# Altium PCB Concentrator1.PcbDoc
Units mm, origin at the board's own origin, x right, y up, seen from the top; angles counter-clockwise.
Board outline 100 x 90 mm, 2 copper layers (Top Layer, Bottom Layer); 86 components, 77 nets, 318 pads, 29 vias.
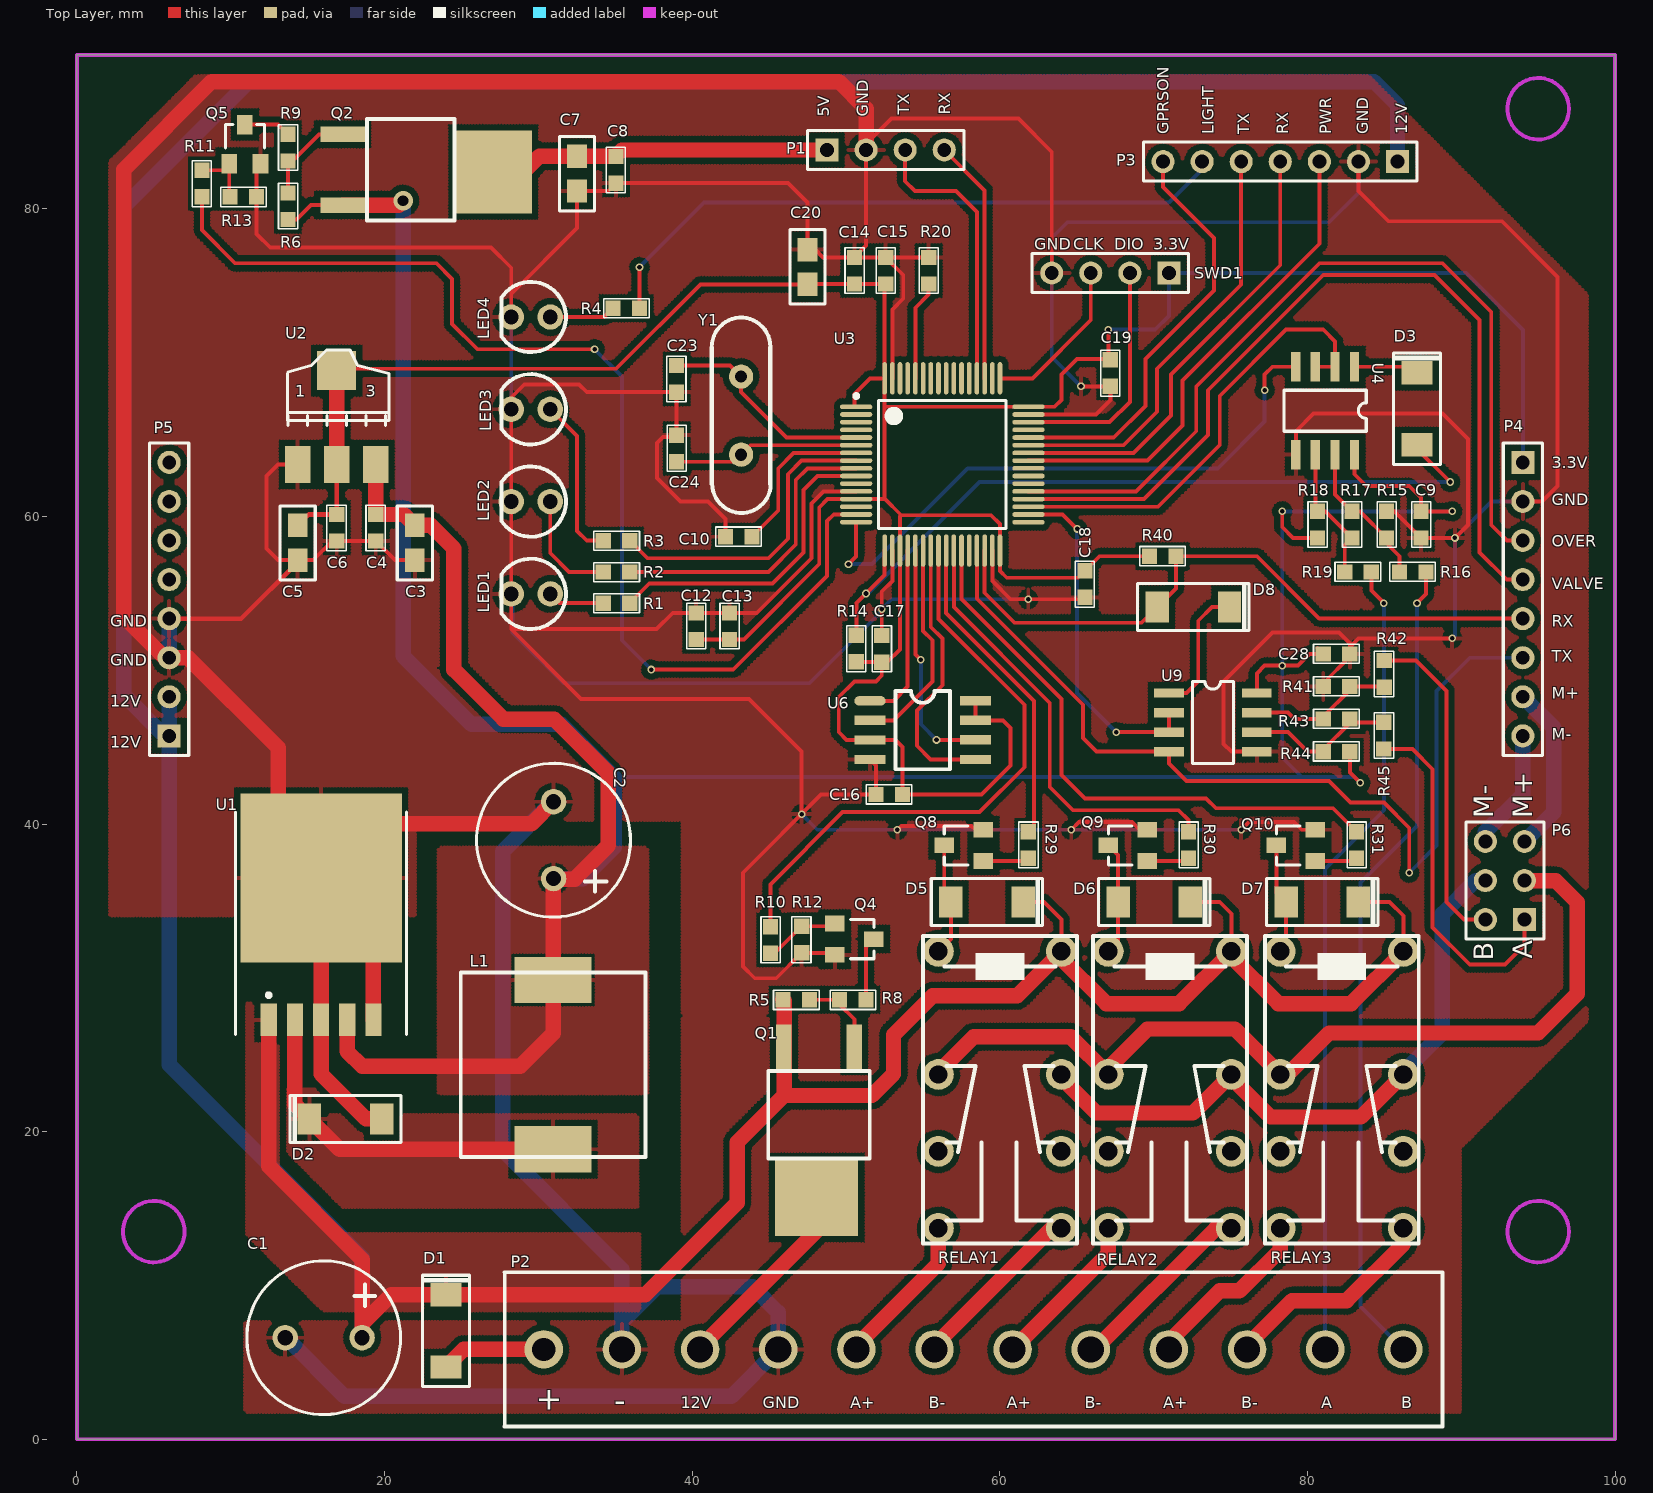
[diagram p0: Top Layer view]
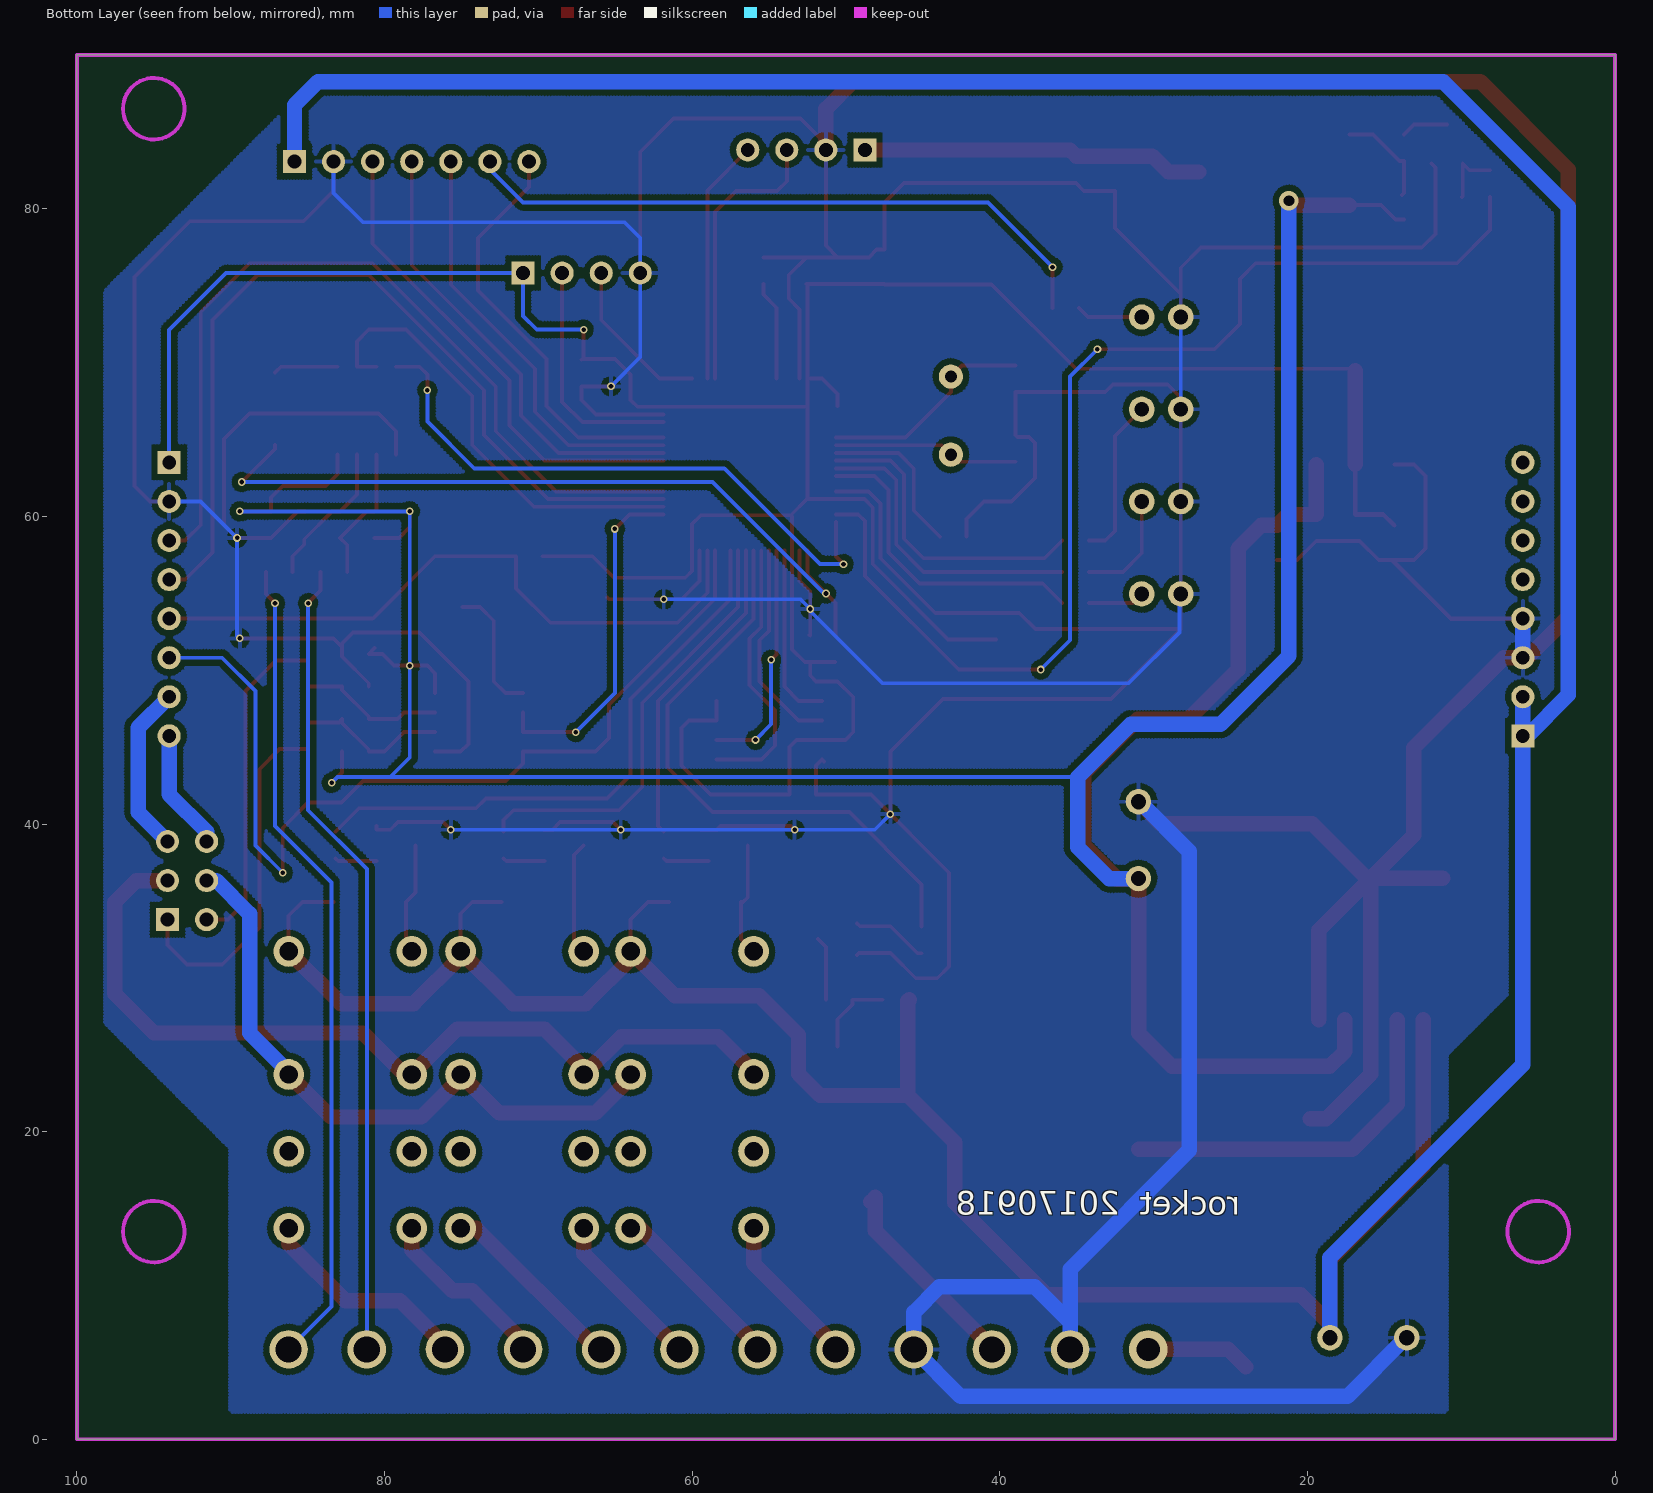
[diagram p1: Bottom Layer view, seen from below]

## Layer stack, top to bottom
Top Layer: signal copper 0.0356
Dielectric: dielectric 0.32, FR-4, Dk 4.8
Bottom Layer: signal copper 0.0356

## Board outline
0,0 0,90 100,90 100,0

## Design rules (kind name [scope] priority, off if disabled: settings)
Clearance [All] p1: gap=0.2
ComponentClearance [All] p1: gap=0.254 collisioncheckmode=3 verticalgap=0.254
PolygonConnect [All] p1: connectstyle=Relief reliefconductorwidth=0.254 reliefentries=4 polygonreliefangle="90 Angle"
RoutingVias [All] p1: holewidth=0.3 width=0.5 viastyle="Through Hole" minholewidth=0.3 minwidth=0.5 maxholewidth=0.711 maxwidth=1.27
SolderMaskExpansion [All] p1: expansion=0.102
TestPointUsage [All] p1: valid=0 allowmultiple=FALSE
Testpoint [All] p1: side=15 testpointundercomponent=TRUE minsize=1.016 maxsize=2.54 preferedsize=1.524 minholesize=0 maxholesize=1.016 preferedholesize=0.813 testpointgrid=0.025 style=1023 order=0123456789
Width [All] p1: maxlimit=1 minlimit=0.254 preferedwidth=0.254
18 further rules are at their usual default settings.

## Components (designator, comment, footprint, x,y, rotation, side; value= is the part's Value field where it differs from the comment)
C1 "Cap Pol1" "C_DJ - duplicate" 18.542,6.604 r0 top
C2 "Cap Pol1" "C_DJ - duplicate" 30.988,36.449 r270 top
C3 "Cap" 0805 21.971,57.15 r90 top
C4 "Cap" 0603 19.431,58.395 r270 top
C5 "Cap" 0805 14.351,57.15 r90 top
C6 "Cap" 0603 16.891,58.395 r270 top
C7 "Cap" 0805 32.512,81.153 r90 top
C8 "Cap" 0603 35.052,81.661 r270 top
C9 "Cap" 0603 87.376,60.325 r90 top
C10 "Cap" 0603 42.164,58.674 r180 top
C12 "Cap" 0603 40.259,53.721 r90 top
C13 "Cap" 0603 42.418,53.721 r90 top
C14 "Cap" 0603 50.546,76.835 r90 top
C15 "Cap" 0603 52.578,76.835 r90 top
C16 "Cap" 0603 51.943,41.91 r180 top
C17 "Cap" 0603 52.324,52.248 r90 top
C18 "Cap" 0603 65.532,54.737 r270 top
C19 "Cap" 0603 67.183,68.453 r270 top
C20 "Cap" 0805 47.498,77.343 r270 top
C23 "Cap" 0603 38.989,68.072 r270 top
C24 "Cap" 0603 38.989,65.278 r90 top
C28 "Cap" 0603 81.026,51.054 r180 top
D1 "Diode 1N4007" M7-4007 24.003,4.699 r90 top
D2 "SS34" M7-4007 19.812,20.828 r180 top
D3 "M7" M7-4007 87.122,64.643 r90 top
D5 "M7" M7-4007 56.816,34.925 r0 top
D6 "M7" M7-4007 67.691,34.925 r0 top
D7 "M7" M7-4007 78.613,34.925 r0 top
D8 "M7" M7-4007 70.231,54.102 r0 top
L1 "Inductor" L12*12 36.957,30.353 r180 top
LED1 "LED" LED 30.775,54.96 r180 top
LED2 "LED" LED 30.775,60.96 r180 top
LED3 "LED" LED 30.775,66.96 r180 top
LED4 "LED" LED 30.775,72.96 r180 top
P1 "Header 4" HDR1X4 48.768,83.82 r0 top
P2 "Header 12" P12 30.353,5.842 r0 top
P3 "Header 7" HDR1X7 85.852,83.058 r180 top
P4 "Header 8" HDR1X8 94,63.509 r270 top locked
P5 "Header 8" HDR1X8 6,45.729 r90 top locked
P6 "Header 3X2" HDR2X3 94.107,33.782 r90 top locked
Q1 "PMOS-2" 78M05/20 50.546,25.527 r180 top
Q2 "PMOS-2" 78M05/20 17.272,84.836 r270 top
Q4 "2N3904" NPN-PNP 49.276,33.528 r270 top
Q5 "2N3904" NPN-PNP 9.906,82.931 r0 top
Q8 "2N3904" NPN-PNP 58.928,37.592 r90 top
Q9 "2N3904" NPN-PNP 69.596,37.592 r90 top
Q10 "2N3904" NPN-PNP 80.518,37.592 r90 top
R1 "Res2" 0603 35.941,54.356 r0 top
R2 "Res2" 0603 35.941,56.388 r0 top
R3 "Res2" 0603 35.941,58.42 r0 top
R4 "Res2" 0603 36.576,73.533 r0 top
R5 "Res2" 0603 47.625,28.575 r0 top
R6 "Res2" 0603 13.716,81.026 r90 top
R8 "Res2" 0603 51.308,28.575 r0 top
R9 "Res2" 0603 13.716,84.836 r90 top
R10 "Res2" 0603 45.085,33.325 r90 top
R11 "Res2" 0603 8.128,80.772 r270 top
R12 "Res2" 0603 47.117,31.623 r270 top
R13 "Res2" 0603 11.684,80.772 r0 top
R14 "Res2" 0603 50.673,50.546 r270 top
R15 "Res2" 0603 85.132,60.325 r90 top
R16 "Res2" 0603 85.979,56.388 r180 top
R17 "Res2" 0603 82.889,60.325 r90 top
R18 "Res2" 0603 80.645,60.325 r90 top
R19 "Res2" 0603 82.423,56.388 r180 top
R20 "Res2" 0603 55.372,76.835 r90 top
R29 "Res2" 0603 61.849,39.497 r90 top
R30 "Res2" 0603 72.263,39.497 r90 top
R31 "Res2" 0603 83.185,39.497 r90 top
R40 "Res2" 0603 69.723,57.404 r180 top
R41 "Res2" 0603 81.026,48.937 r180 top
R42 "Res2" 0603 84.988,48.895 r270 top
R43 "Res2" 0603 81.026,46.821 r180 top
R44 "Res2" 0603 81.026,44.704 r180 top
R45 "Res2" 0603 84.963,46.609 r90 top
RELAY1 "Relay-DPDT" Relay-DPDP 64.008,13.716 r180 top
RELAY2 "Relay-DPDT" Relay-DPDP 75.057,13.716 r180 top
RELAY3 "Relay-DPDT" Relay-DPDP 86.233,13.716 r180 top
SWD1 "SWD" HDR1X4 70.993,75.819 r180 top
U1 "LM2596S-5.0" TO-263-5 15.875,31.496 r0 top
U2 "AMS1117-3.3" AMS-1117 14.351,63.373 r0 top
U3 "STM32F103RBT6" LQFP64_M 56.261,63.373 r0 top
U4 "SP485" SOP8 83.058,69.723 r180 top
U6 "W25X16" W24X16 51.562,48.006 r0 top
U9 "SP485" SOP8 70.993,48.514 r270 top
Y1 "8M" OSC 43.18,64.008 r270 top

## Footprints (in the part's own frame and the unit in brackets; to place one, negate y for a bottom-side part, rotate by r counter-clockwise, add the part's x,y. Pads: shape width x height; smd on the part's side, far side on the other; paste and mask are expansions set on the pad)
78M05/20 [mm]
  rect 1x2.9 smd: 1(0,0) 3(4.6,0)
  rect 5.4x5 smd: 2(2.45,9.8)
  silkscreen extent -1,1.57 5.6,7.27
0603 [mil]
  rect 39x39 smd: 1(0,0) 2(-68,0)
  silkscreen extent -92,-25 25,24
0805 [mil]
  rect 60x50 smd: 1(0,0) 2(89.02,0)
  silkscreen extent -51,-45 139,45
AMS-1117 [mil]
  rect 65x94.49 smd: 1(0,0) 2(100,0) 3(200,0)
  rect 100x100 smd: 4(100,240)
  silkscreen extent -26,100 234,293
"C_DJ - duplicate" [mil]
  round 65 hole 39: 1(0,0) 2(-196.85,0)
  silkscreen extent -295,-197 98,197
HDR1X4 [mm] "Connector; Header; 4 Position"
  rect 1.5x1.5 hole 0.9: 1(0,0)
  round 1.5 hole 0.9: 2(2.54,0) 3(5.08,0) 4(7.62,0)
  silkscreen extent -1.27,-1.27 8.89,1.27
HDR1X7 [mm] "Connector; Header; 7 Position"
  rect 1.5x1.5 hole 0.9: 1(0,0)
  round 1.5 hole 0.9: 2(2.54,0) 3(5.08,0) 4(7.62,0) 5(10.16,0) 6(12.7,0) 7(15.24,0)
  silkscreen extent -1.27,-1.27 16.51,1.27
HDR1X8 [mm] "Connector; Header; 8 Position"
  rect 1.5x1.5 hole 0.9: 1(0,0)
  round 1.5 hole 0.9: 2(2.54,0) 3(5.08,0) 4(7.62,0) 5(10.16,0) 6(12.7,0) 7(15.24,0) 8(17.78,0)
  silkscreen extent -1.27,-1.27 19.05,1.27
HDR2X3 [mm] "Connector; Header; 3x2 Position"
  rect 1.5x1.5 hole 0.9: 1(0,0)
  round 1.5 hole 0.9: 2(0,2.54) 3(2.54,0) 4(2.54,2.54) 5(5.08,0) 6(5.08,2.54)
  silkscreen extent -1.27,-1.27 6.35,3.81
L12*12 [mm]
  rect 5x3 smd: 1(6,11.5) 2(6,0.5)
  silkscreen extent 0,0 12,12
LED [mil]
  round 65 hole 38: A(0,0) K(100,0)
  silkscreen extent -40,-90 125,90
LQFP64_M [mm] "Thin QFP, 64-Leads, Body 10x10mm, Pitch 0.5mm, IPC Low Density"
  oval 2.1x0.3 smd: 1(-5.6,3.75) 2(-5.6,3.25) 3(-5.6,2.75) 4(-5.6,2.25) 5(-5.6,1.75) 6(-5.6,1.25) 7(-5.6,0.75) 8(-5.6,0.25) 9(-5.6,-0.25) 10(-5.6,-0.75) 11(-5.6,-1.25) 12(-5.6,-1.75) 13(-5.6,-2.25) 14(-5.6,-2.75) 15(-5.6,-3.25) 16(-5.6,-3.75) 33(5.6,-3.75) 34(5.6,-3.25) 35(5.6,-2.75) 36(5.6,-2.25) 37(5.6,-1.75) 38(5.6,-1.25) 39(5.6,-0.75) 40(5.6,-0.25) 41(5.6,0.25) 42(5.6,0.75) 43(5.6,1.25) 44(5.6,1.75) 45(5.6,2.25) 46(5.6,2.75) 47(5.6,3.25) 48(5.6,3.75)
  oval 0.3x2.1 smd: 17(-3.75,-5.6) 18(-3.25,-5.6) 19(-2.75,-5.6) 20(-2.25,-5.6) 21(-1.75,-5.6) 22(-1.25,-5.6) 23(-0.75,-5.6) 24(-0.25,-5.6) 25(0.25,-5.6) 26(0.75,-5.6) 27(1.25,-5.6) 28(1.75,-5.6) 29(2.25,-5.6) 30(2.75,-5.6) 31(3.25,-5.6) 32(3.75,-5.6) 49(3.75,5.6) 50(3.25,5.6) 51(2.75,5.6) 52(2.25,5.6) 53(1.75,5.6) 54(1.25,5.6) 55(0.75,5.6) 56(0.25,5.6) 57(-0.25,5.6) 58(-0.75,5.6) 59(-1.25,5.6) 60(-1.75,5.6) 61(-2.25,5.6) 62(-2.75,5.6) 63(-3.25,5.6) 64(-3.75,5.6)
  silkscreen extent -5.72,-4.15 4.15,4.57, body extent -5,-5 5,5, height 1.6
M7-4007 [mil]
  rect 60x80 smd: 1(0,0) 2(185,0)
  silkscreen extent -50,-60 235,60
NPN-PNP [mil]
  rect 40x50 smd: B(0,0) C(40,100) E(80,0)
  silkscreen extent -10,40 90,100
OSC [mil]
  round 62 hole 31: 1(0,0) 2(-200,0)
  silkscreen extent -351,-75 149,76
P12 [mm]
  round 2.5 hole 1.5: 1(0,0)
  round 2.5 hole 1.7: 2(5.08,0) 3(10.16,0) 4(15.24,0) 5(20.32,0) 6(25.4,0) 7(30.48,0) 8(35.56,0) 9(40.64,0) 10(45.72,0) 11(50.8,0) 12(55.88,0)
  silkscreen extent -2.56,-5 58.42,5.02
Relay-DPDP [mm]
  round 2 hole 1.2: 1(0,-10) 2(0,-5) 3(0,0) 4(8,-10) 5(8,-5) 6(8,0) 7(0,-18) 8(8,-18)
  silkscreen extent -1,-19 9,1
SOP8 [mil]
  rect 24x76 smd: 1(0,0) 2(50,0) 3(100,0) 4(150,0) 5(150,225) 6(100,225) 7(50,225) 8(0,225)
  silkscreen extent -30,60 180,165
TO-263-5 [mm]
  rect 1.05x2.1 smd: 1(-3.4,-4.225) 2(-1.7,-4.225) 3(0,-4.225) 4(1.7,-4.225) 5(3.4,-4.225)
  rect 10.5x11 smd: 6(0,4.987)
  silkscreen extent -5.55,-5.18 5.55,9.28, body extent -5.33,-4.7 5.33,10.29, height 3
W24X16 [mil]
  oval 80x24 smd: 1(0,0)
  rect 80x24 smd: 2(0,-50.06) 3(0,-100.06) 4(0,-150.06) 5(270,-150) 6(270,-100) 7(270,-50) 8(270,0)
  silkscreen extent 65,-175 205,25

## Part data
C1 C2: "Polarized Capacitor (Radial)"
C3 C4 C5 C6 C7 C8 C9 C10 C12 C13 C14 C15 C16 C17 C18 C19 C20 C23 C24 C28: "Capacitor"
D1: "1 Amp General Purpose Rectifier"
D2 D3 D5 D6 D7 D8: library part "Diode 1N4007", "1 Amp General Purpose Rectifier"
LED1 LED2 LED3 LED4: library part LED0, "Typical INFRARED GaAs LED"
P1: "Header, 4-Pin"
P2 P5 SWD1: library part "Header 4", "Header, 4-Pin"
P3: "Header, 7-Pin"
P4: "Header, 8-Pin"
P6: "Header, 3-Pin, Dual row"
Q1 Q2: "P-Channel Power MOSFET"
Q4 Q5 Q8 Q9 Q10: "NPN General Purpose Amplifier"
R1 R2 R3 R4 R5 R6 R8 R9 R10 R11 R12 R13 R14 R15 R16 R17 R18 R19 R20 R29 R30 R31 R40 R41 R42 R43 R44 R45: "Resistor"
RELAY1 RELAY2 RELAY3: "Dual-Pole Dual-Throw Relay"
U1: "5V稳压芯片"
U3: "STM32 ARM-based 32-bit MCU with 128 Kbytes Flash, 64-pin LQFP, Industrial Temperature"
U4 U9: library part Pro55.tmp_SP485_20
U6: library part W24X16
Y1: library part XTAL, "Crystal Oscillator"

## Via types
v1: diameter 0.5, hole 0.3, Top Layer to Bottom Layer, 28 vias
v2: diameter 1.27, hole 0.711, Top Layer to Bottom Layer, 1 vias

## Nets (pads, with @x,y where several pads share a name; then routed paths per layer and width w, separated by ;. In a path a pad name is that pad's centre, name@x,y a point inside that pad or via, vN(x,y) a via of type N, cw(c..) or ccw(c..) an arc to the next point about the centre after c; other vN are vias at no path point)
12V/485: P2.3 Q1.2 | length 13.4
  Top Layer w1: P2.3 40.513,5.969 48.096,13.552 Q1.2 Q1.2@48.387,15.436
485_CTRL1: U3.34 U9.2 U9.3 | length 22.5
  Top Layer w0.254: U3.34 64.083,60.123 v1(65.024,59.182) ; v1(67.564,45.974) U9.3 U9.2
  Bottom Layer w0.254: v1(65.024,59.182) 65.024,48.514 v1(67.564,45.974)
485_CTRL2: U3.35 U4.2 U4.3 | length 29.8
  Top Layer w0.254: U3.35 70.275,60.623 74.295,64.643 74.295,67.818 78.613,72.136 81.026,72.136 81.788,71.374 U4.2 U4.3
485A1: P6.1 R45.2 | length 23.2
  Top Layer w0.254: R45.2 86.817,44.882 88.138,43.561 88.138,33.274 90.551,30.861 92.837,30.861 94.107,32.131 P6.1
485A2: P2.11 R19.2 | length 52.5
  Top Layer w0.254: R19.2 84.15,55.169 v1(84.963,54.356)
  Bottom Layer w0.254: P2.11 81.153,37.084 84.963,40.894 v1(84.963,54.356)
485B1: P6.2 R42.2 | length 21.6
  Top Layer w0.254: R42.2 87.046,50.622 89.027,48.641 89.027,34.925 90.17,33.782 P6.2
485B2: P2.12 R16.2 | length 53.5
  Top Layer w0.254: v1(87.122,54.356) 87.706,54.94 R16.2
  Bottom Layer w0.254: P2.12 83.439,8.636 83.439,36.195 87.122,39.878 v1(87.122,54.356)
485POW_CTRL: R10.1 U3.24 | length 38.8
  Top Layer w0.254: R10.1 45.085,36.068 49.784,40.767 58.674,40.767 61.595,43.688 61.595,47.752 56.011,53.336 U3.24
A+: P6.3 RELAY1.4 RELAY2.4 RELAY3.4 | length 58.5
  Top Layer w1: RELAY1.4 56.008,23.877 58.293,26.162 64.611,26.162 RELAY2.4 67.057,24.131 69.596,26.67 75.279,26.67 RELAY3.4 78.707,23.716 81.407,26.416 94.996,26.416 97.536,28.956 97.536,34.925 96.139,36.322 P6.3
B-: P6.4 RELAY1.1 RELAY2.1 RELAY3.1 | length 42.1
  Top Layer w1: RELAY1.1 64.008,23.495 66.294,21.209 72.55,21.209 RELAY2.1 75.057,23.495 77.597,20.955 83.472,20.955 RELAY3.1
  Bottom Layer w1: RELAY3.1@86.36,23.622 86.36,24.003 88.773,26.416 88.773,34.163 90.932,36.322 P6.4
BUS+1: P2.5 RELAY1.6 | length 10.1
  Top Layer w1: P2.5 50.673,6.096 56.008,11.431 RELAY1.6
BUS+2: P2.7 RELAY2.6 | length 10.3
  Top Layer w1: P2.7 67.056,12.065 RELAY2.6@67.056,13.589
BUS+3: P2.9 RELAY3.6 | length 11.6
  Top Layer w1: P2.9 70.993,6.35 74.295,9.652 75.565,9.652 78.233,12.32 RELAY3.6
BUS-1: P2.6 RELAY1.3 | length 11.7
  Top Layer w1: P2.6 55.753,6.096 63.373,13.716 RELAY1.3
BUS-2: P2.8 RELAY2.3 | length 12.4
  Top Layer w1: P2.8 66.167,5.842 74.041,13.716 RELAY2.3
BUS-3: P2.10 RELAY3.3 | length 14.2
  Top Layer w1: P2.10 76.073,6.096 78.994,9.017 82.55,9.017 86.233,12.7 RELAY3.3
DELAY_1: R29.1 U3.25 | length 20.8
  Top Layer w0.254: U3.25 56.511,53.725 62.23,48.006 62.23,39.878 R29.1
DELAY_2: R30.1 U3.26 | length 28.6
  Top Layer w0.254: U3.26 57.011,54.114 63.246,47.879 63.246,42.418 64.77,40.894 71.628,40.894 72.263,40.259 R30.1
DELAY_3: R31.1 U3.27 | length 38
  Top Layer w0.254: U3.27 57.511,54.63 64.008,48.133 64.008,43.18 65.532,41.656 73.406,41.656 74.041,41.021 81.661,41.021 R31.1
GND: C1.2 C2.2 C3.1 C4.1 C5.1 C6.1 C7.1 C8.1 C9.2 C10.1 C12.1 C13.1 C14.1 C15.1 C16.1 C17.1 C18.1 C19.1 C20.1 C23.1 C24.1 C28.2 D2.1 LED1.K LED2.K LED3.K LED4.K P1.2 P2.2 P2.4 P3.2 P4.2 P5.3 P5.4 Q4.E Q5.E Q8.E Q9.E Q10.E R12.1 R13.1 R15.1 R20.1 R41.1 SWD1.4 U1.3 U1.5 U1.6 U2.1 U3.12 U3.18 U3.31 U3.47 U3.63 U4.5 U6.4 U9.5 | length 742.1
  Top Layer w0.254: Q5.E 11.684,82.677 11.684,78.359 12.573,77.47 26.924,77.47 28.235,76.159 LED4.K ; U2.1 13.081,63.373 12.319,62.611 12.319,57.912 13.081,57.15 15.367,57.15 16.612,58.395 C4.1 20.676,57.15 C3.1 ; 28.235,74.463 32.512,78.74 C7.1 34.544,81.153 C8.1 46.228,81.661 47.498,80.391 C20.1 48.006,77.343 48.514,76.835 R20.1 ; C10.1 42.164,59.817 41.021,60.96 39.243,60.96 37.719,62.484 37.719,64.77 38.1,65.151 38.862,65.151 C24.1 C23.1 33.147,68.072 32.639,68.58 29.083,68.58 28.235,67.732 28.235,52.664 ; v1(47.117,40.64) 47.117,44.704 43.688,48.133 32.766,48.133 28.235,52.664 ; Q4.E 49.149,31.623 R12.1 45.466,29.972 44.069,29.972 43.307,30.734 43.307,36.83 48.387,41.91 C16.1 51.943,43.813 U6.4 U6.4@51.435,44.067 ; C14.1 51.308,77.597 51.308,84.201 52.959,85.852 61.214,85.852 63.373,83.693 SWD1.4 ; U3.12 48.542,61.623 47.752,60.833 47.752,57.277 44.196,53.721 38.735,53.721 37.678,52.664 28.235,52.664 ; C17.1@52.376,52.3 C17.1 52.324,55.118 53.011,55.805 U3.18 ; C15.1 53.721,75.692 53.721,74.168 53.011,73.458 U3.63 ; v1(53.34,39.624) 53.594,39.878 58.166,39.878 58.42,39.624 Q8.E@59.436,39.624 ; U3.31 59.511,55.805 60.706,54.61 65.405,54.61 C18.1 ; U3.47 66.242,66.623 67.183,67.564 C19.1 v1(65.278,68.453) ; v1(64.643,39.624) 65.151,40.132 68.58,40.132 69.088,39.624 Q9.E ; v1(75.692,39.624) 76.2,40.132 79.121,40.132 79.629,39.624 Q10.E Q10.E@80.518,39.878 ; U9.5 75.057,44.704 74.549,45.212 74.549,49.276 77.724,52.451 82.042,52.451 82.753,51.74 C28.2 82.753,50.876 81.026,49.149 R41.1 ; U4.5 79.248,65.532 80.391,66.675 88.773,66.675 90.424,65.024 90.424,59.436 v1(89.586,58.598) C9.2 85.649,60.325 R15.1 ; C28.2@82.753,51.511 83.312,52.07 v1(89.408,52.07) ; P3.2 83.312,81.153 85.281,79.184 92.647,79.184 96.266,75.565 96.266,61.976 95.259,60.969 P4.2
  Top Layer w0.3: P5.4@6.096,53.34 10.668,53.34 C5.1@14.478,57.15
  Top Layer w1: P5.3 5.706,50.809 3.048,53.467 3.048,82.55 8.763,88.265 49.53,88.265 51.308,86.487 P1.2 ; P5.3@6.096,50.8 7.239,50.8 13.081,44.958 13.081,39.277 19.275,33.083 U1.5 ; U1.6@11.21,36.483 U1.6 15.875,23.749 18.796,20.828 D2.1 ; U1.6@15.875,36.195 19.685,40.005 29.544,40.005 C2.2
  Bottom Layer w0.254: LED1.K 28.321,54.874 28.321,52.451 31.623,49.149 47.625,49.149 52.324,53.848 v1(52.324,53.975) 52.959,54.61 v1(61.849,54.61) ; LED3.K LED4.K ; v1(47.117,40.64) 48.133,39.624 v1(75.692,39.624) ; v1(65.278,68.453) 63.373,70.358 63.373,78.105 64.389,79.121 81.407,79.121 83.312,81.026 P3.2@83.312,83.185 ; v1(89.408,52.07) 89.586,52.248 v1(89.586,58.598) 91.957,60.969 P4.2
  Bottom Layer w1: P5.3 6,53.244 P5.4@6.096,53.34 ; C1.2 13.589,6.604 17.399,2.794 42.545,2.794 P2.4 45.593,8.255 43.942,9.906 37.719,9.906 35.433,7.62 ; C2.2 30.908,41.449 27.686,38.227 27.686,18.796 35.433,11.049 P2.2
GPRS_RX: P3.4 U3.42 | length 29.7
  Top Layer w0.254: U3.42 68.695,64.123 71.12,66.548 71.12,69.215 78.232,76.327 P3.4
GPRS_TX: P3.5 U3.43 | length 27.8
  Top Layer w0.254: U3.43 68.052,64.623 70.231,66.802 70.231,69.596 75.692,75.057 P3.5
GPRSPWR_CTRL: P3.3 U3.41 | length 31.8
  Top Layer w0.254: U3.41 69.592,63.623 71.882,65.913 71.882,68.834 80.772,77.724 P3.3
GPRSPWRKEY: P3.7 U3.44 | length 27.5
  Top Layer w0.254: U3.44 67.409,65.123 69.469,67.183 69.469,70.231 73.914,74.676 73.914,78.105 70.612,81.407 P3.7
LED1: R1.1 U3.10 | length 20.5
  Top Layer w0.254: R1.1 37.211,55.626 45.212,55.626 47.244,57.658 47.244,61.722 48.145,62.623 U3.10
LED2: R2.1 U3.9 | length 20
  Top Layer w0.254: R2.1 44.958,56.388 46.736,58.166 46.736,62.357 47.502,63.123 U3.9
LED3: R3.1 U3.8 | length 20.3
  Top Layer w0.254: R3.1 37.084,57.277 44.958,57.277 46.228,58.547 46.228,62.738 47.113,63.623 U3.8
LORA_5V: C7.2 C8.2 P1.1 Q2.2 | length 22.3
  Top Layer w1: Q2.2 29.046,82.386 30.074,83.414 35.026,83.414 35.432,83.82 P1.1
LORA_RX: P1.4 U3.51 | length 15.9
  Top Layer w0.254: P1.4 59.011,81.197 U3.51
LORA_TX: P1.3 U3.52 | length 18.3
  Top Layer w0.254: P1.3 53.848,81.788 54.483,81.153 57.15,81.153 58.511,79.792 U3.52
LORAPOW_CTRL: R11.1 U3.15 | length 74.5
  Top Layer w0.254: R11.1 8.128,78.613 10.287,76.454 23.368,76.454 24.384,75.438 24.384,72.517 26.035,70.866 v1(33.655,70.866) ; v1(37.338,50.038) 42.672,50.038 48.768,56.134 48.768,59.69 49.201,60.123 U3.15
  Bottom Layer w0.254: v1(33.655,70.866) 35.433,69.088 35.433,51.943 v1(37.338,50.038)
M+: P4.7 P6.5 | length 11.2
  Bottom Layer w0.254: P4.7@93.98,48.289 P4.7@93.98,48.387
  Bottom Layer w1: P4.7@93.98,48.289 96.012,46.257 96.012,40.767 P6.5
M-: P4.8 P6.6 | length 7.9
  Bottom Layer w1: P6.6 91.567,39.497 94,41.93 P4.8
NetC10_2: C10.2 U3.7 | length 10.6
  Top Layer w0.254: C10.2 45.593,60.376 45.593,63.119 46.597,64.123 U3.7
NetC23_2: C23.2 U3.5 Y1.2 | length 14.2
  Top Layer w0.254: C23.2 42.469,69.799 Y1.2 43.18,68.072 46.129,65.123 U3.5
NetC24_2: C24.2 U3.6 Y1.1 | length 12.1
  Top Layer w0.254: C24.2 42.723,63.551 43.795,64.623 U3.6
NetD2_2: D2.2 L1.1 U1.2 | length 23.5
  Top Layer w1: U1.2 14.175,21.766 17.088,18.853 L1.1
NetD3_2: D3.2 U4.1 | length 4.2
  Top Layer w0.254: U4.1 86.741,69.723 D3.2
NetD5_1: D5.1 Q8.C RELAY1.8 | length 7.4
  Top Layer w0.254: RELAY1.8 56.816,32.524 D5.1 ; Q8.C 56.388,35.226 D5.1@56.689,34.925
NetD6_1: D6.1 Q9.C RELAY2.8 | length 7.4
  Top Layer w0.254: Q9.C 67.691,37.973 67.691,32.35 RELAY2.8
NetD7_1: D7.1 Q10.C RELAY3.8 | length 7.3
  Top Layer w0.254: Q10.C 77.978,35.56 D7.1 78.613,32.096 RELAY3.8
NetD8_2: D8.2 U9.1 | length 8.6
  Top Layer w0.254: U9.1 72.136,48.514 72.898,49.276 72.898,53.213 73.787,54.102 D8.2
NetLED1_A: LED1.A R1.2 | length 3.7
  Top Layer w0.254: LED1.A 31.379,54.356 R1.2
NetLED2_A: LED2.A R2.2 | length 7.3
  Top Layer w0.254: LED2.A 30.775,57.617 32.004,56.388 R2.2
NetLED3_A: LED3.A R3.2 | length 10.6
  Top Layer w0.254: LED3.A 32.512,65.223 32.512,59.055 33.147,58.42 R3.2
NetLED4_A: LED4.A R4.2 | length 4.3
  Top Layer w0.254: LED4.A 34.276,72.96 R4.2
NETLIGHT: P3.6 R4.1 | length 42.4
  Top Layer w0.254: R4.1 v1(36.576,76.2)
  Bottom Layer w0.254: v1(36.576,76.2) 40.767,80.391 70.993,80.391 73.152,82.55 P3.6
NetQ1_1: Q1.1 R5.1 R8.2 | length 5.4
  Top Layer w0.254: R5.1 R8.2 49.581,28.27 50.546,27.305 Q1.1
NetQ2_1: Q2.1 R6.1 R9.2 | length 6.5
  Top Layer w0.254: R6.1@13.843,80.899 R6.1 R9.2 14.021,83.109 15.748,84.836 Q2.1
NetQ4_B: Q4.B R10.2 R12.2 | length 5
  Top Layer w0.254: R10.2 45.364,31.598 R12.2 49.098,33.35 Q4.B
NetQ4_C: Q4.C R8.1 | length 4.1
  Top Layer w0.254: R8.1 51.308,32.004 Q4.C
NetQ5_B: Q5.B R11.2 R13.2 | length 4.1
  Top Layer w0.254: R11.2 9.474,82.499 Q5.B 9.906,80.823 R13.2
NetQ5_C: Q5.C R9.1 | length 3.1
  Top Layer w0.254: Q5.C 13.081,85.471 R9.1
NetQ8_B: Q8.B R29.2 | length 3
  Top Layer w0.254: Q8.B 61.671,37.592 R29.2
NetQ9_B: Q9.B R30.2 | length 2.7
  Top Layer w0.254: Q9.B 72.085,37.592 R30.2
NetQ10_B: Q10.B R31.2 | length 2.7
  Top Layer w0.254: Q10.B 83.007,37.592 R31.2
NetR15_2: R15.2 R16.1 R17.1 U4.7 | length 9.7
  Top Layer w0.254: U4.7 81.788,61.426 R17.1 83.405,60.325 85.217,58.513 85.217,58.166 85.979,57.404 R16.1
NetR17_2: R17.2 R18.1 R19.1 U4.6 | length 9.1
  Top Layer w0.254: U4.6 80.518,60.452 R18.1 81.161,60.325 R17.2 82.423,58.132 R19.1
NetR20_2: R20.2 U3.60 | length 6.5
  Top Layer w0.254: U3.60 54.511,73.561 55.372,74.422 R20.2
NetR41_2: R41.2 R42.1 R43.1 U9.7 | length 9.6
  Top Layer w0.254: U9.7 78.74,47.244 79.163,46.821 R43.1 81.026,46.99 82.753,48.717 R41.2 84.946,48.937 R42.1
NetR43_2: R43.2 R44.1 R45.1 U9.6 | length 10
  Top Layer w0.254: U9.6 78.74,45.974 80.01,44.704 R44.1 81.026,44.831 82.753,46.558 R43.2 82.965,46.609 R45.1
OVER: P4.3 U3.37 | length 55.6
  Top Layer w0.254: U3.37 68.862,61.623 72.771,65.532 72.771,68.453 80.772,76.454 88.773,76.454 91.948,73.279 91.948,59.436 92.959,58.425 93.996,58.425 P4.3
SPI1_MISO: U3.22 U6.2 | length 13.9
  Top Layer w0.254: U6.2 53.084,46.734 55.626,49.276 55.626,51.943 55.011,52.558 U3.22
SPI1_MOSI: U3.23 U6.5 | length 17.9
  Top Layer w0.254: U3.23 55.511,52.82 56.261,52.07 56.261,49.022 54.61,47.371 54.61,45.085 55.499,44.196 U6.5
SPI1_NSS: U3.20 U6.1 | length 11.7
  Top Layer w0.254: U6.1 53.086,48.006 54.011,48.931 U3.20
SPI1_SCK: U3.21 U6.6 | length 15.4
  Top Layer w0.254: U3.21 54.511,51.026 v1(54.864,50.673) ; v1(55.88,45.466) U6.6
  Bottom Layer w0.254: v1(54.864,50.673) 54.864,46.482 v1(55.88,45.466)
SWCLK: SWD1.3 U3.49 | length 10.5
  Top Layer w0.254: U3.49 62.115,68.973 65.913,72.771 SWD1.3
SWDIO: SWD1.2 U3.46 | length 15.5
  Top Layer w0.254: U3.46 67.139,66.123 68.453,67.437 SWD1.2
USART2_RX: D3.1 R14.2 U3.17 | length 50.5
  Top Layer w0.254: R14.2 50.673,54.356 52.511,56.194 U3.17 ; D3.1 87.122,64.389 v1(89.281,62.23)
  Bottom Layer w0.254: v1(51.301,54.984) 51.428,54.984 58.674,62.23 v1(89.281,62.23)
USART2_TX: U3.16 U4.4 | length 39.1
  Top Layer w0.254: v1(50.165,56.896) 50.661,57.392 U3.16 ; v1(77.216,68.199) 77.216,69.215 77.724,69.723 U4.4
  Bottom Layer w0.254: v1(50.165,56.896) 51.689,56.896 57.912,63.119 74.168,63.119 77.216,66.167 v1(77.216,68.199)
USART3_RX: D8.1 P4.5 R40.2 U3.30 | length 43.2
  Top Layer w0.254: U3.30 59.011,55.035 60.96,53.086 69.215,53.086 71.45,55.321 R40.2 76.708,57.404 80.763,53.349 P4.5
USART3_TX: P4.6 U3.29 U9.4 | length 61.1
  Top Layer w0.254: U3.29 58.511,54.646 65.405,47.752 65.405,45.593 66.294,44.704 U9.4 70.993,43.942 72.136,42.799 81.407,42.799 82.804,41.402 84.963,41.402 86.614,39.751 v1(86.614,36.83)
  Bottom Layer w0.254: v1(86.614,36.83) 88.392,38.608 88.392,48.641 90.56,50.809 P4.6
VALVE: P4.4 U3.36 | length 56.9
  Top Layer w0.254: U3.36 69.378,61.123 73.533,65.278 73.533,68.199 81.026,75.692 88.265,75.692 91.186,72.771 91.186,57.658 92.955,55.889 P4.4
VCC_3.3V: C5.2 C6.2 C12.2 C13.2 C14.2 C15.2 C16.2 C17.2 C18.2 C19.2 C20.2 P4.1 R14.1 R40.1 SWD1.1 U2.2 U2.4 U3.1 U3.13 U3.19 U3.32 U3.48 U3.64 U6.3 U6.7 U6.8 | length 206.2
  Top Layer w0.254: U2.4@17.018,69.596 35.052,69.596 40.538,75.082 C20.2 47.524,75.108 C15.2 52.511,75.041 52.511,61.154 ; C12.2 43.358,51.994 48.26,56.896 48.26,60.579 48.804,61.123 52.48,61.123 52.511,61.154 ; U3.1@50.546,67.183 50.546,67.945 51.562,68.961 U3.64@52.511,68.961 ; R14.1@50.698,50.521 52.68,50.521 53.511,51.352 53.511,59.988 53.594,60.071 ; C17.2 52.324,49.657 51.943,49.276 50.546,49.276 49.53,48.26 49.53,45.974 50.04,45.464 53.215,45.464 53.67,45.009 C16.2 58.801,41.91 60.706,43.815 60.706,46.228 60.198,46.736 U6.7 U6.8 ; 52.578,67.123 63.567,67.123 64.008,67.564 64.008,69.215 65.024,70.231 C19.2@67.132,70.231 ; v1(67.056,72.136) 67.056,70.307 C19.2 ; R40.1 66.472,57.404 65.075,56.007 60.452,56.007 60.011,56.448 60.011,59.496 59.436,60.071 53.594,60.071 ; 52.511,61.154 53.594,60.071
  Top Layer w0.3: C5.2 15.062,60.122 C6.2 U2.2
  Top Layer w1: U2.2 U2.4
  Bottom Layer w0.254: v1(67.056,72.136) 70.104,72.136 70.993,73.025 SWD1.1 90.297,75.819 94,72.116 P4.1
VCC_5V: C2.1 C3.2 C4.2 C9.1 C28.1 L1.2 Q2.3 R6.2 R18.2 R44.2 U1.4 U2.3 U4.8 U9.8 | length 229.5
  Top Layer w0.254: R6.2 14.275,79.299 15.212,80.236 Q2.3 ; U9.8 76.708,49.784 77.216,50.292 79.375,50.292 80.137,51.054 C28.1 C28.1@80.645,51.435 ; v1(78.359,60.325) 78.359,59.309 79.07,58.598 R18.2 ; R44.2 82.753,43.358 v1(83.439,42.672) ; U4.8 83.058,62.738 83.82,61.976 86.614,61.976 87.376,61.214 C9.1 v1(89.408,60.325)
  Top Layer w0.3: C4.2 C4.2@19.736,59.817 ; C3.2@21.983,59.424 C3.2@22.098,59.309
  Top Layer w1: Q2.3 20.927,80.236 v2(21.209,80.518) ; U1.4 17.575,25.224 18.542,24.257 28.829,24.257 30.957,26.385 30.957,36.418 32.354,36.418 34.544,38.608 34.544,43.307 31.032,46.819 27.73,46.819 24.511,50.038 ; U2.3 C4.2 21.26,60.122 C3.2 23.012,59.411 24.511,57.912 24.511,50.165
  Bottom Layer w0.254: 34.925,43.053 83.058,43.053 v1(83.439,42.672) ; 79.629,43.053 78.359,44.323 v1(78.359,60.325) v1(89.408,60.325)
  Bottom Layer w1: v2(21.209,80.518) 21.209,50.927 25.654,46.482 31.496,46.482 34.925,43.053 34.925,38.481 32.893,36.449 C2.1
  other v1: 78.359,50.292
VCC_12V: C1.1 D1.2 D5.2 D6.2 D7.2 P3.1 P5.1 P5.2 Q1.3 R5.2 RELAY1.7 RELAY2.7 RELAY3.7 U1.1 | length 306.3
  Top Layer w0.254: D5.2 62.865,34.925 64.008,33.782 RELAY1.7 ; D6.2 74.295,34.925 75.057,34.163 RELAY2.7 ; D7.2 85.344,34.925 86.233,34.036 RELAY3.7@86.233,31.75
  Top Layer w1: U1.1 12.475,17.751 18.542,11.684 C1.1 ; 18.542,7.493 20.447,9.398 36.957,9.398 42.926,15.367 42.926,19.304 45.974,22.352 ; R5.2 45.974,28.499 45.974,22.352 ; RELAY1.7@63.881,31.75 63.881,31.369 66.929,28.321 71.662,28.321 RELAY2.7 75.057,31.369 78.105,28.321 82.838,28.321 RELAY3.7 ; RELAY1.7 61.121,28.829 55.626,28.829 53.086,26.289 53.086,23.749 51.689,22.352 45.974,22.352
  Bottom Layer w1: P5.1 5.706,45.729 3.048,48.387 3.048,80.137 11.176,88.265 84.328,88.265 85.852,86.741 P3.1 ; P5.2 6,24.353 18.542,11.811 C1.1
VCC_12V_IN: D1.1 P2.1 | length 6.8
  Top Layer w1: D1.1 25.146,5.842 P2.1
pads on no net: P5.5 P5.6 P5.7 P5.8 RELAY1.2 RELAY1.5 RELAY2.2 RELAY2.5 RELAY3.2 RELAY3.5 U3.2 U3.3 U3.4 U3.11 U3.14 U3.28 U3.33 U3.38 U3.39 U3.40 U3.45 U3.50 U3.53 U3.54 U3.55 U3.56 U3.57 U3.58 U3.59 U3.61 U3.62

## Polygon pours and split planes (outlines as drawn)
GND on Top Layer "Top Layer-No Net" (hatched 90Degree grid 0.2 track 0.254, remove dead copper): 10.922,1.778 22.606,1.778 89.916,1.778 89.916,5.715 89.916,18.923 97.917,26.924 98.171,27.178 98.171,41.529 98.171,74.422 90.678,81.915 83.947,88.646 74.041,88.646 7.747,88.646 2.413,83.312 2.159,83.058 2.159,59.436 2.159,34.036 13.843,34.036 21.971,34.036 21.971,40.259 36.195,40.259 39.37,40.259 39.37,32.893 39.37,7.62 13.081,7.62 10.922,7.62
VCC_12V on Top Layer "Top Layer-No Net" (hatched 90Degree grid 0.2 track 0.254, remove dead copper): 36.576,13.335 36.576,8.382 28.448,8.382 16.002,8.382 14.732,9.652 11.049,13.335 11.049,28.321 13.081,28.321 13.081,23.241 13.081,17.018 16.764,13.335
VCC_5V on Top Layer "Top Layer-No Net" (hatched 90Degree grid 0.2 track 0.254, remove dead copper): 23.495,38.481 37.084,38.481 37.084,22.479 35.56,22.479 23.495,22.479
NetD2_2 on Top Layer "Top Layer-No Net" (hatched 90Degree grid 0.2 track 0.254, remove dead copper, pour order 1001): 13.716,22.733 13.716,18.669 15.24,17.145 17.272,15.113 23.495,15.113 36.449,15.113 36.449,21.082 16.129,21.082 16.129,22.733
GND on Bottom Layer "Top Layer-No Net" (hatched 90Degree grid 0.2 track 0.254, remove dead copper): 10.922,1.778 17.145,1.778 90.043,1.778 90.043,4.445 90.043,18.923 98.171,27.051 98.171,29.21 98.171,74.676 84.074,88.773 78.105,88.773 7.747,88.773 2.032,83.058 2.032,79.121 2.032,33.909 10.922,25.019

## Keep-outs
Keep-Out Layer:
  circle w0.254: c5,13.5 r2
  circle w0.254: c95,13.5 r2
  circle w0.254: c95,86.5 r2
  lines w0.254: 0,0 100,0 100,90 0,90 0,0

## Silkscreen, mask and mechanical layers (free items; w line width, h text height)
Top Overlay:
  text "TX" at 54.102,86.106 h0.76 r90
  text "RX" at 56.769,86.106 h0.76 r90
  text "5V" at 48.895,85.979 h0.76 r90
  text "GND" at 51.435,85.979 h0.76 r90
  text "GPRSON" at 70.993,84.836 h0.76 r90
  text "LIGHT" at 73.914,84.836 h0.76 r90
  text "TX" at 76.2,84.836 h0.76 r90
  text "RX" at 78.74,84.836 h0.76 r90
  text "PWR" at 81.534,84.836 h0.76 r90
  text "GND" at 83.947,84.836 h0.76 r90
  text "12V" at 86.487,84.836 h0.76 r90
  text "GND" at 62.23,77.343 h0.76
  text "CLK" at 64.77,77.343 h0.76
  text "DIO" at 67.437,77.343 h0.76
  text "3.3V" at 69.977,77.343 h0.76
  text "3.3V" at 95.885,63.119 h0.76
  text "GND" at 95.885,60.706 h0.76
  text "OVER" at 95.885,58.039 h0.76
  text "VALVE" at 95.885,55.245 h0.76
  text "GND" at 2.159,52.832 h0.76
  text "RX" at 95.885,52.832 h0.76
  text "TX" at 95.885,50.546 h0.76
  text "GND" at 2.159,50.292 h0.76
  text "M+" at 95.885,48.133 h0.76
  text "12V" at 2.159,47.625 h0.76
  text "M-" at 95.885,45.466 h0.76
  text "12V" at 2.159,44.958 h0.76
  text "12V" at 39.243,2.032 h0.76
  text "GND" at 44.577,2.032 h0.76
  text "A+" at 50.292,2.032 h0.76
  text "B-" at 55.372,2.032 h0.76
  text "A+" at 60.452,2.032 h0.76
  text "B-" at 65.532,2.032 h0.76
  text "A+" at 70.612,2.032 h0.76
  text "B-" at 75.692,2.032 h0.76
  text "A" at 80.899,2.032 h0.76
  text "B" at 86.106,2.032 h0.76
  text "+" at 29.845,1.905 h1.52
  text "-" at 34.925,1.778 h1.52
Bottom Overlay:
  text "rocket  20170918" at 24.384,14.605 h1.52

## Text inside footprints (layer, text, board x,y; h text height)
P6: Top Overlay "M-" at 92.075,40.386 h1.27 r90; Top Overlay "M+" at 94.615,40.386 h1.27 r90; Top Overlay "B" at 92.075,31.115 h1.27 r90; Top Overlay "A" at 94.615,31.242 h1.27 r90
U2: Top Overlay "3" at 18.771,67.767 h0.76; Top Overlay "1" at 14.199,67.767 h0.76